# EAGLE board Sch_test (EAGLE 7.5.0)

Size 100 x 80 mm. Coordinates in mm from the lower left corner, seen from the top.
Outline: 0,0 100,0 100,80 0,80 0,0
Copper layers (1*16): Top 0.035mm / dielectric 1.5mm / Bottom 0.035mm
Design rules "default": minimum track width 10mil, minimum drill 24mil, track to track 8mil, track to pad 8mil, pad to pad 8mil, via to via 8mil, smd to smd 8mil, copper to edge 40mil, drill to drill 8mil, minimum pad ring 10mil, minimum via ring 8mil, stop-mask expansion 4mil, vias tented up to drill 0mil, thermal gap 10mil

## Footprints (pad centres in the part's own frame; a part is rotated, then mirrored left to right if it is on the bottom)
PINHEAD5X5 = drill 0.8 offset: 1 -5.08,0; 2 -2.54,0; 3 0,0; 4 2.54,0; 5 5.08,0; 6 -5.08,-2.54; 7 -2.54,-2.54; 8 0,-2.54; 9 2.54,-2.54; 10 5.08,-2.54
C025-025X050 = drill 0.813 octagon: 1 -1.27,0; 2 1.27,0
DO35-7 = drill 0.813 long: A 3.81,0; C -3.81,0
LED-0603 = smd 1 x 1: A 0,-0.877; C 0,0.877
SO16 = smd 0.66 x 2.032: 1 -4.445,-3.073; 2 -3.175,-3.073; 3 -1.905,-3.073; 4 -0.635,-3.073; 5 0.635,-3.073; 6 1.905,-3.073; 7 3.175,-3.073; 8 4.445,-3.073; 9 4.445,3.073; 10 3.175,3.073; 11 1.905,3.073; 12 0.635,3.073; 13 -0.635,3.073; 14 -1.905,3.073; 15 -3.175,3.073; 16 -4.445,3.073
PINHEAD2X2 = drill 0.8 square: P$1 -2.54,0; P$2 0,0; P$3 0,-2.54; P$4 -2.54,-2.54
2X03 = drill 1.016 octagon: 1 -2.54,-1.27; 2 -2.54,1.27; 3 0,-1.27; 4 0,1.27; 5 2.54,-1.27; 6 2.54,1.27
1X05 = drill 1.016 long: 1 -5.08,0; 2 -2.54,0; 3 0,0; 4 2.54,0; 5 5.08,0
1X02 = drill 1.016 long: 1 -1.27,0; 2 1.27,0
1X03 = drill 1.016 long: 1 -2.54,0; 2 0,0; 3 2.54,0
PINHEAD1X20 = drill 0.8 long: P$1 25.4,0; P$2 22.86,0; P$3 20.32,0; P$4 17.78,0; P$5 15.24,0; P$6 12.7,0; P$7 10.16,0; P$8 7.62,0; P$9 5.08,0; P$10 2.54,0; P$11 0,0; P$12 -2.54,0; P$13 -5.08,0; P$14 -7.62,0; P$15 -10.16,0; P$16 -12.7,0; P$17 -15.24,0; P$18 -17.78,0; P$19 -20.32,0; P$20 -22.86,0
HC49/S = drill 0.813: 1 -2.413,0; 2 2.413,0
0805-THM = drill 0.813 pad 1.676 octagon: 1 -5.08,0; 2 5.08,0
TO92 = drill 0.813 octagon: 1 1.27,0; 2 0,1.905; 3 -1.27,0
SOP65P490X110-8N = smd 1.524 x 0.457: 1 -2.032,0.965; 2 -2.032,0.33; 3 -2.032,-0.33; 4 -2.032,-0.965; 5 2.032,-0.965; 6 2.032,-0.33; 7 2.032,0.33; 8 2.032,0.965
DIL40 = drill 0.813 long: 1 -24.13,-7.62; 2 -21.59,-7.62; 3 -19.05,-7.62; 4 -16.51,-7.62; 5 -13.97,-7.62; 6 -11.43,-7.62; 7 -8.89,-7.62; 8 -6.35,-7.62; 9 -3.81,-7.62; 10 -1.27,-7.62; 11 1.27,-7.62; 12 3.81,-7.62; 13 6.35,-7.62; 14 8.89,-7.62; 15 11.43,-7.62; 16 13.97,-7.62; 17 16.51,-7.62; 18 19.05,-7.62; 19 21.59,-7.62; 20 24.13,-7.62; 21 24.13,7.62; 22 21.59,7.62; 23 19.05,7.62; 24 16.51,7.62; 25 13.97,7.62; 26 11.43,7.62; 27 8.89,7.62; 28 6.35,7.62; 29 3.81,7.62; 30 1.27,7.62; 31 -1.27,7.62; 32 -3.81,7.62; 33 -6.35,7.62; 34 -8.89,7.62; 35 -11.43,7.62; 36 -13.97,7.62; 37 -16.51,7.62; 38 -19.05,7.62; 39 -21.59,7.62; 40 -24.13,7.62
SO28W = smd 0.65 x 1.7: 1 -8.89,-4.78; 2 -7.62,-4.78; 3 -6.35,-4.78; 4 -5.08,-4.78; 5 -3.81,-4.78; 6 -2.54,-4.78; 7 -1.27,-4.78; 8 0,-4.78; 9 1.27,-4.78; 10 2.54,-4.78; 11 3.81,-4.78; 12 5.08,-4.78; 13 6.35,-4.78; 14 7.62,-4.78; 15 7.62,4.78; 16 6.35,4.78; 17 5.08,4.78; 18 3.81,4.78; 19 2.54,4.78; 20 1.27,4.78; 21 0,4.78; 22 -1.27,4.78; 23 -2.54,4.78; 24 -3.81,4.78; 25 -5.08,4.78; 26 -6.35,4.78; 27 -7.62,4.78; 28 -8.89,4.78
P-250-202 = drill 1 long: L1 1.3,2.55; L2 -3.7,-0.95

## Placement (x,y rotation side)
AUX1  ETH_ADAPTER  [PINHEAD5X5]  -44.45,29.21 0 top  (outside the outline)
C1  22pf  [C025-025X050]  -15.24,57.15 0 top  (outside the outline)
C2  22pf  [C025-025X050]  -21.59,57.15 0 top  (outside the outline)
D1  1N4148DO35-7  [DO35-7]  -62.23,80.01 0 top  (outside the outline)
D2  RED  [LED-0603]  -39.37,91.44 0 top  (outside the outline)
D3  GREEN  [LED-0603]  -43.18,91.44 0 top  (outside the outline)
D4  ORANGE  [LED-0603]  -46.99,91.44 0 top  (outside the outline)
IC2  ULN2003AD  [SO16]  -41.91,39.37 0 top  (outside the outline)
IC3  ULN2003AD  [SO16]  -55.88,39.37 0 top  (outside the outline)
IO1  ENC_DASH  [PINHEAD2X2]  -30.48,41.91 0 top  (outside the outline)
JP1  ISP  [2X03]  -80.01,25.4 0 top  (outside the outline)
JP2  Stepper1  [1X05]  -69.85,39.37 0 top  (outside the outline)
JP3  Stepper2  [1X05]  -20.32,49.53 0 top  (outside the outline)
JP4  DiscLight1  [1X02]  -45.72,49.53 0 top  (outside the outline)
JP5  Disclight2  [1X02]  -54.61,49.53 0 top  (outside the outline)
JP6  LB1  [1X03]  -62.23,49.53 0 top  (outside the outline)
JP7  LB2  [1X03]  -71.12,49.53 0 top  (outside the outline)
JP8  outsideTemp  [1X02]  -35.56,49.53 0 top  (outside the outline)
JP9  Photocell  [1X02]  -81.28,49.53 0 top  (outside the outline)
LCD1  LCD12864  [PINHEAD1X20]  -41.91,86.36 0 top  (outside the outline)
Q1  16MHz  [HC49/S]  -19.05,40.64 0 top  (outside the outline)
R1  180  [0805-THM]  -31.75,57.15 0 top  (outside the outline)
R2  180  [0805-THM]  -44.45,57.15 0 top  (outside the outline)
R3  4,7k  [0805-THM]  -57.15,57.15 0 top  (outside the outline)
R4  10k  [0805-THM]  -69.85,57.15 0 top  (outside the outline)
R5  10k  [0805-THM]  -19.05,64.77 0 top  (outside the outline)
R6  10k  [0805-THM]  -31.75,64.77 0 top  (outside the outline)
R7  10k  [0805-THM]  -44.45,64.77 0 top  (outside the outline)
R8  [0805-THM]  -30.48,91.44 0 top  (outside the outline)
R9  10K  [0805-THM]  -57.15,64.77 0 top  (outside the outline)
R10  0  [0805-THM]  -69.85,64.77 0 top  (outside the outline)
R11  0  [0805-THM]  -19.05,72.39 0 top  (outside the outline)
R12  0  [0805-THM]  -31.75,72.39 0 top  (outside the outline)
R13  0  [0805-THM]  -44.45,72.39 0 top  (outside the outline)
R14  0  [0805-THM]  -57.15,72.39 0 top  (outside the outline)
R15  0  [0805-THM]  -69.85,72.39 0 top  (outside the outline)
R16  150  [0805-THM]  -19.05,80.01 0 top  (outside the outline)
R17  91  [0805-THM]  -31.75,80.01 0 top  (outside the outline)
R18  160  [0805-THM]  -44.45,80.01 0 top  (outside the outline)
T1  BC337  [TO92]  -76.2,85.09 0 top  (outside the outline)
T2  BC337  [TO92]  -21.59,91.44 0 top  (outside the outline)
U$1  MCP9808-E/MS  [SOP65P490X110-8N]  -68.58,25.4 0 top  (outside the outline)
U$2  ARDUINO_1284P  [DIL40]  -39.37,10.16 0 top  (outside the outline)
U$3  MCP23016  [SO28W]  -24.13,26.67 0 top  (outside the outline)
X1_5V  250-202  [P-250-202]  -78.74,8.89 0 top  (outside the outline)

## Library data of the parts
AUX1 IO1 LCD1 U$2 U$3 = Btz
C1 C2 = rcl
D1 = diode
D2-D4 = SparkFun-LED; PROD_ID: DIO-00819
IC2 IC3 = uln-udn
JP1-JP9 = pinhead
Q1 = crystal; OC_FARNELL: 1667008; OC_NEWARK: unknown
R1-R18 = adafruit
T1 T2 = transistor
U$1 = mcp9808; MPN: MCP9808-E/MS; OC_FARNELL: 2080523; OC_NEWARK: 89T8871; PACKAGE: MSOP-8; SUPPLIER: MICROCHIP
X1_5V = con-wago_250

## Nets
AVCC: U$2.30
DISCLIGHT1: T1.2 T2.2 U$2.4
GND: U$2.31
N$1: IC2.16 JP2.1
N$2: IC2.15 JP2.2
N$3: IC2.14 JP2.3
N$4: IC2.13 JP2.4
N$5: IC3.16 JP3.1
N$6: IC3.15 JP3.2
N$7: IC3.14 JP3.3
N$8: IC3.13 JP3.4
N$9: JP1.2 R1.1 R2.1 R3.1 R4.1 R5.1 R13.2 R14.2 R15.2 U$1.8 U$2.10 X1_5V.L2
N$10: C1.1 C2.2 JP1.6 R8.2 R9.2 T1.1 T2.1 U$1.4 U$2.11 X1_5V.L1
N$11: JP5.1 T2.3
N$12: JP5.2 R2.2
N$13: JP4.2 R1.2
N$14: JP4.1 T1.3
N$15: D1.A IC2.9 IC3.9 JP2.5 JP3.5 JP8.2 JP9.2 R10.1 R11.1 R12.1 U$3.23
N$16: IC3.1 U$3.15
N$17: C2.1 Q1.1 U$2.13
N$18: IC3.2 U$3.16
N$19: C1.2 Q1.2 U$2.12
N$20: IC3.3 U$3.17
N$21: D1.C JP6.1 JP7.1
N$22: D2.C D3.C D4.C IC2.8 IC3.8 JP6.3 JP7.3 U$3.1 U$3.8 U$3.24
N$23: JP1.1 U$2.7
N$24: JP1.3 U$2.8
N$25: IC3.4 U$3.18
N$26: JP1.4 U$2.6
N$27: JP1.5 R3.2 U$2.9
N$28: U$1.3 U$2.21
N$29: R5.2 R7.1
N$30: U$2.3
N$31: U$2.5
N$32: U$1.2 U$2.22 U$3.14
N$33: U$1.1 U$2.23 U$3.28
N$34: R4.2 R6.1
N$35: IC2.1 U$3.2
N$36: IC2.2 U$3.3
N$37: U$2.18
N$38: U$2.17
N$39: U$2.19
N$40: U$2.20
N$41: R6.2 U$2.16
N$42: R7.2 U$2.24
N$43: IC2.3 U$3.4
N$44: IC2.4 U$3.5
N$45: R14.1 U$1.6
N$46: JP7.2 U$2.25
N$47: JP6.2 U$2.26
N$48: JP8.1 R8.1 U$2.40
N$49: R10.2 U$3.27
N$50: JP9.1 R9.1 U$2.39
N$51: R11.2 U$3.26
N$52: R12.2 U$3.25
N$53: R13.1 U$1.7
N$54: R15.1 U$1.5
N$56: D2.A R16.2
N$57: D3.A R17.2
N$58: D4.A R18.2
N$59: R18.1 U$2.27
N$60: R17.1 U$2.28
N$61: R16.1 U$2.29
VCC: AUX1.5 LCD1.P$2

## Tracks (layer width: path | path; a pad name or v marks a point on that pad's centre or on a via)
DISCLIGHT1  (2 unrouted)
N$1  (1 unrouted)
N$2  (1 unrouted)
N$3  (1 unrouted)
N$4  (1 unrouted)
N$5  (1 unrouted)
N$6  (1 unrouted)
N$7  (1 unrouted)
N$8  (1 unrouted)
N$9  (11 unrouted)
N$10  (9 unrouted)
N$11  (1 unrouted)
N$12  (1 unrouted)
N$13  (1 unrouted)
N$14  (1 unrouted)
N$15  (10 unrouted)
N$16  (1 unrouted)
N$17  (2 unrouted)
N$18  (1 unrouted)
N$19  (2 unrouted)
N$20  (1 unrouted)
N$21  (2 unrouted)
N$22  (9 unrouted)
N$23  (1 unrouted)
N$24  (1 unrouted)
N$25  (1 unrouted)
N$26  (1 unrouted)
N$27  (2 unrouted)
N$28  (1 unrouted)
N$29  (1 unrouted)
N$32  (2 unrouted)
N$33  (2 unrouted)
N$34  (1 unrouted)
N$35  (1 unrouted)
N$36  (1 unrouted)
N$41  (1 unrouted)
N$42  (1 unrouted)
N$43  (1 unrouted)
N$44  (1 unrouted)
N$45  (1 unrouted)
N$46  (1 unrouted)
N$47  (1 unrouted)
N$48  (2 unrouted)
N$49  (1 unrouted)
N$50  (2 unrouted)
N$51  (1 unrouted)
N$52  (1 unrouted)
N$53  (1 unrouted)
N$54  (1 unrouted)
N$56  (1 unrouted)
N$57  (1 unrouted)
N$58  (1 unrouted)
N$59  (1 unrouted)
N$60  (1 unrouted)
N$61  (1 unrouted)
VCC  (1 unrouted)